# Altium PCB etf_blink.PcbDoc
Units mm, origin at the board's own origin, x right, y up, seen from the top; angles counter-clockwise.
Board outline 83 x 40 mm, 4 copper layers (L1 - SIG/PWR, L2 - GND, L3 - PWR, L4 - SIG/GND), stack 0.603 mm thick; 81 components, 56 nets, 244 pads, 97 vias.
Unrouted connection lines stored in the file: 1.
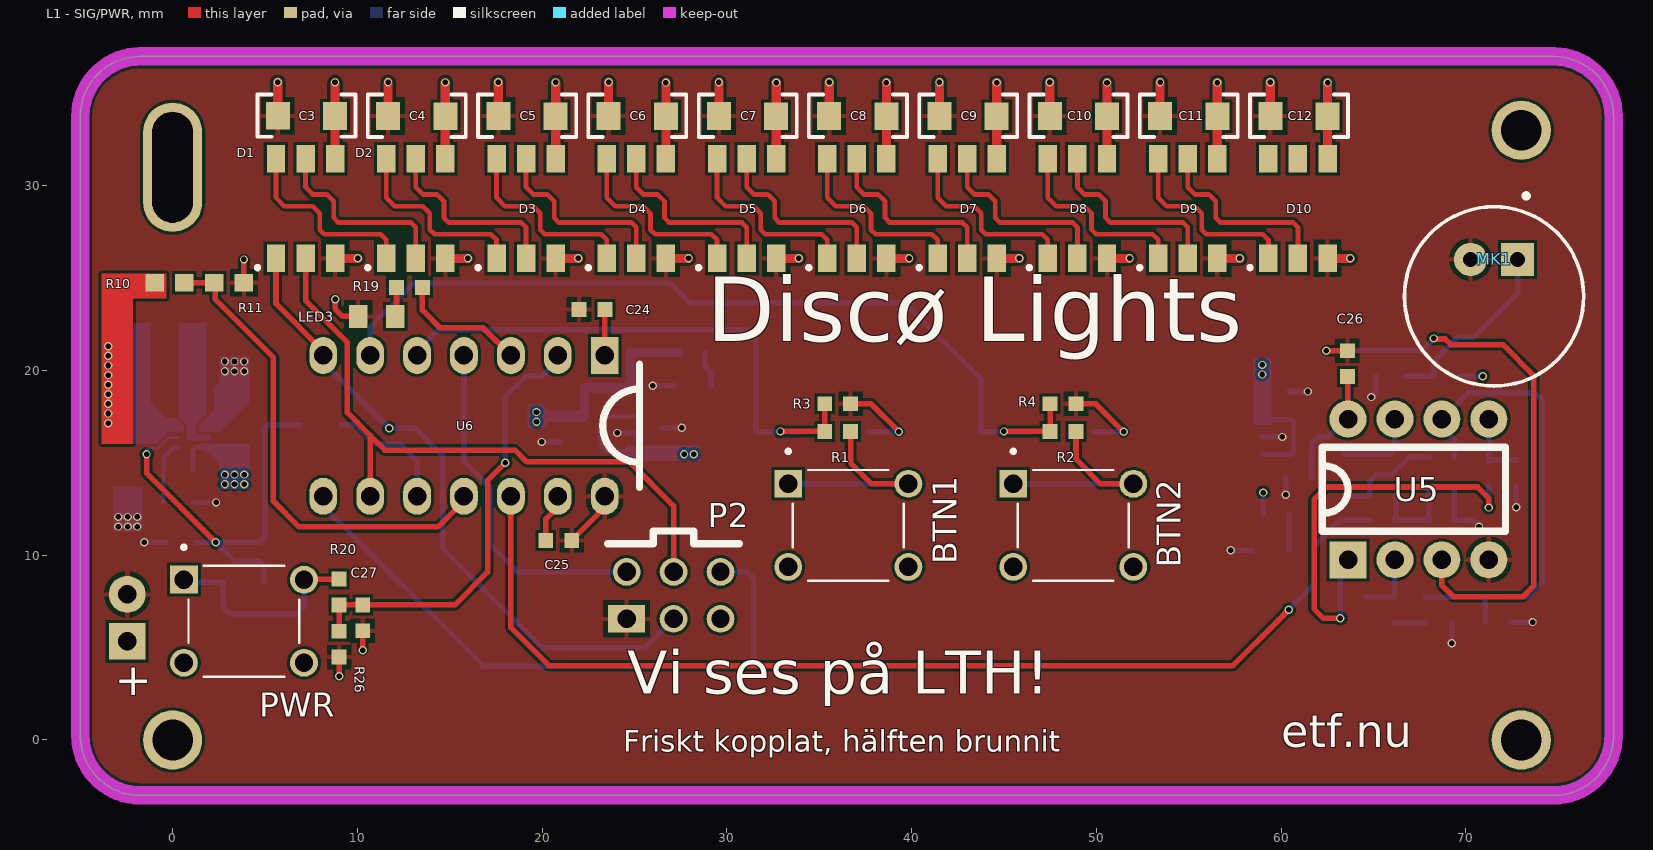
[diagram p0: L1 - SIG/PWR view]
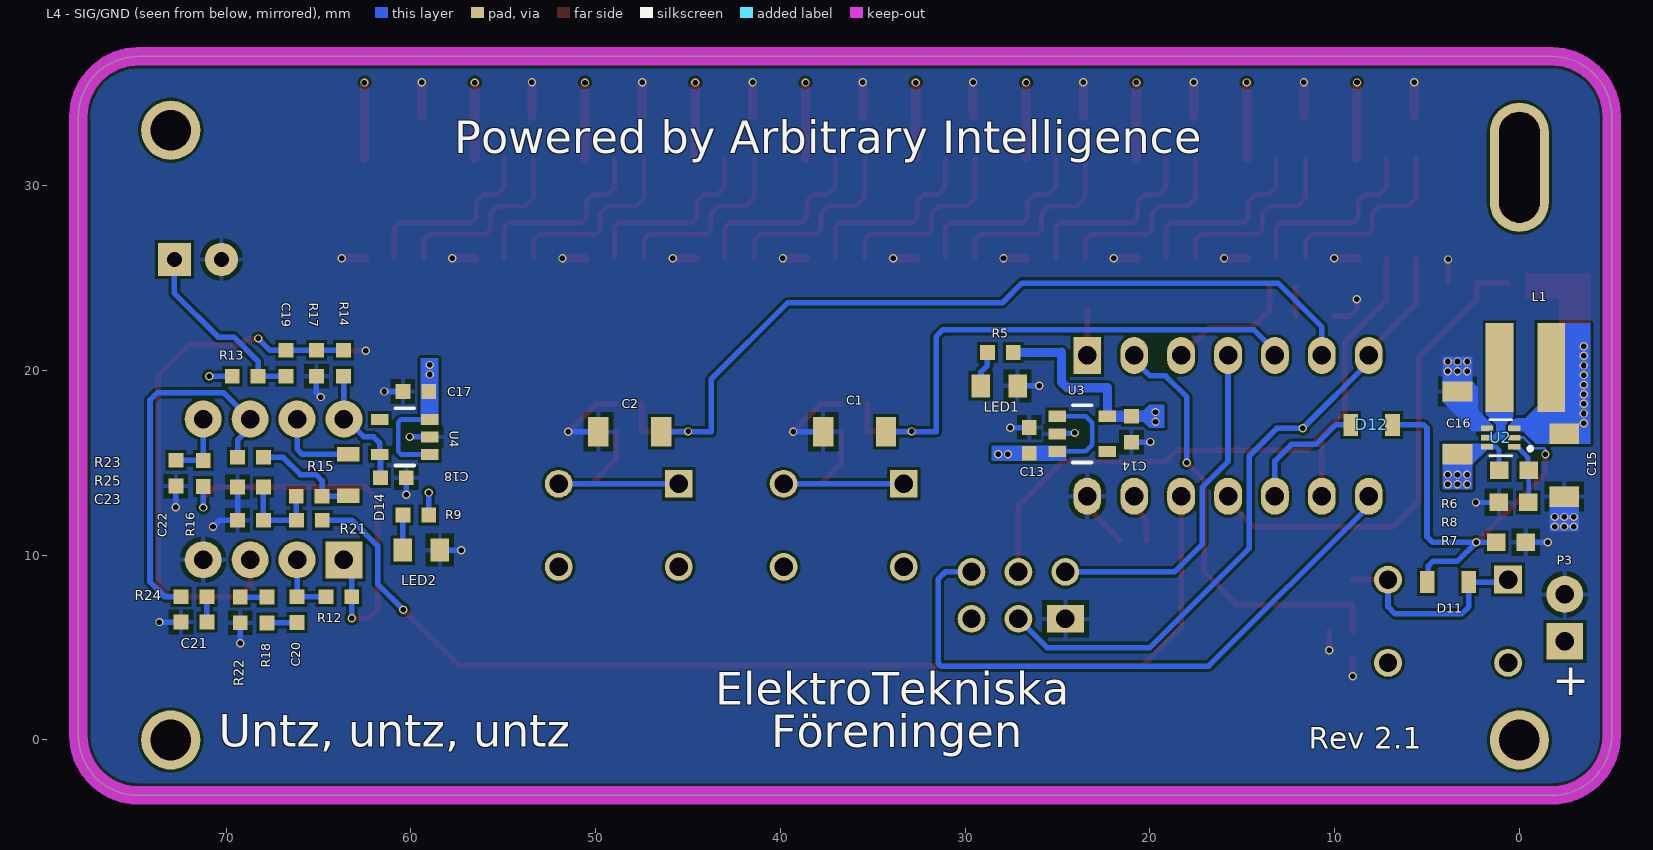
[diagram p1: L4 - SIG/GND view, seen from below]
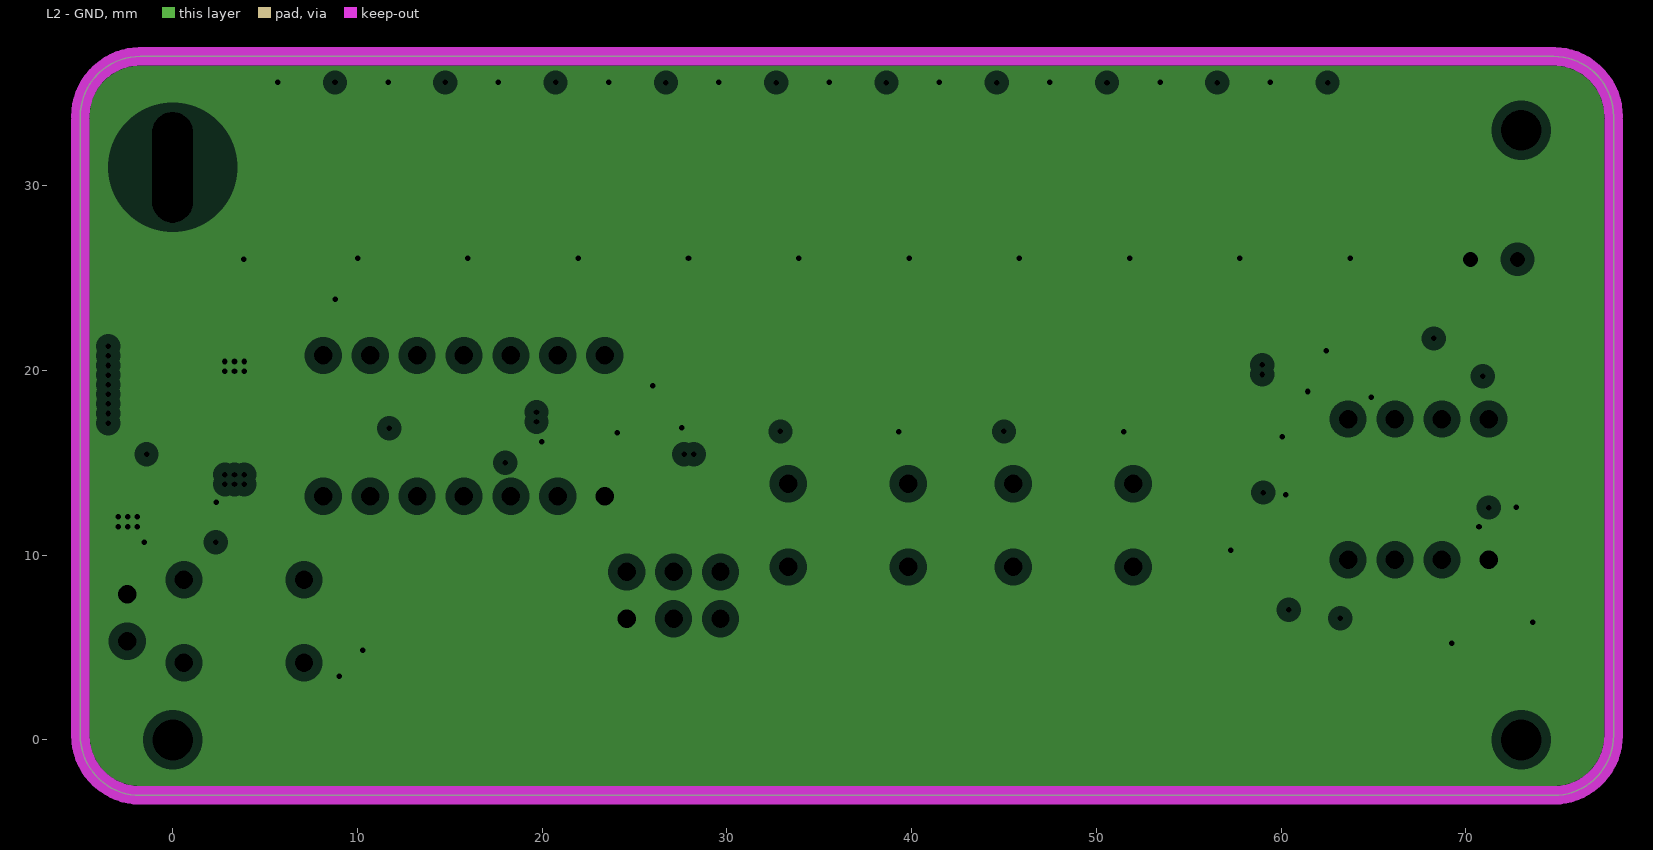
[diagram p2: L2 - GND, clearances drawn from the general rule]
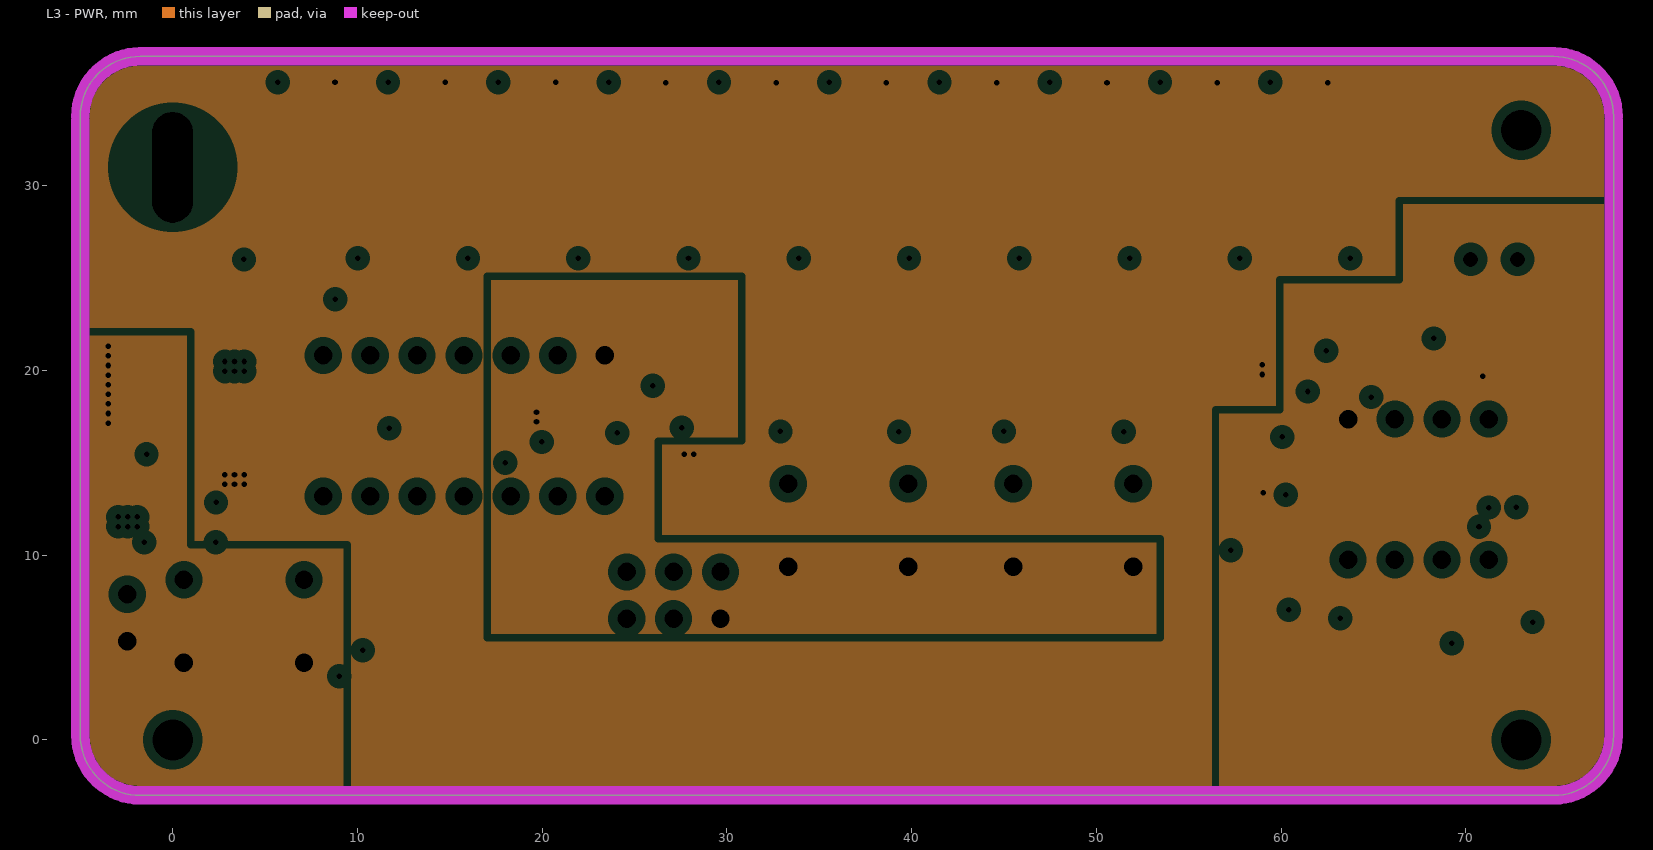
[diagram p3: L3 - PWR, clearances drawn from the general rule]
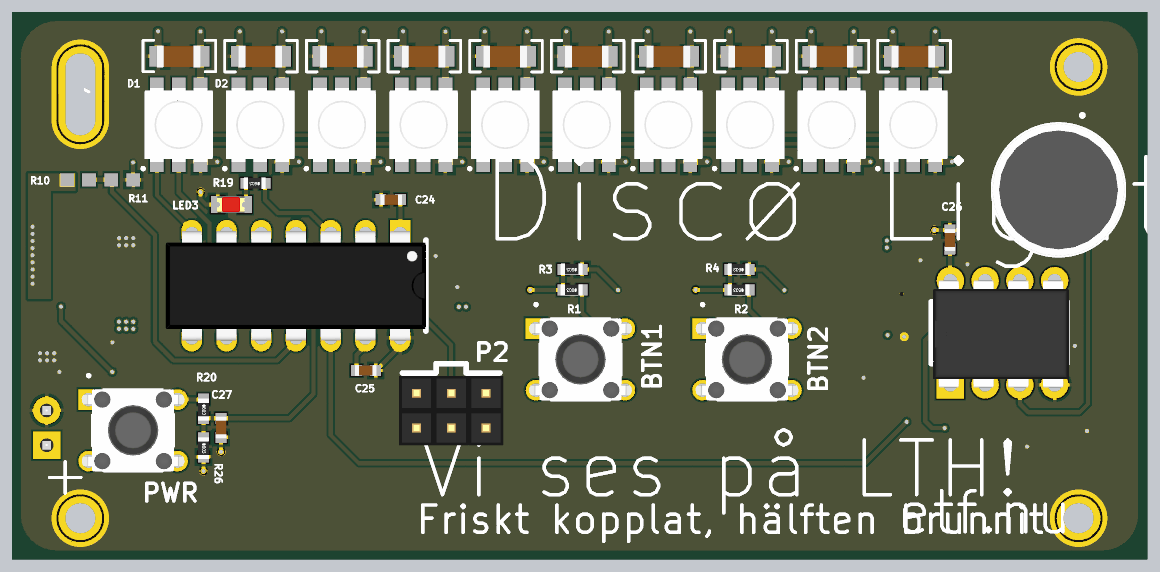
[diagram p4: 3D render of the assembled board from above, using the file's embedded part models]
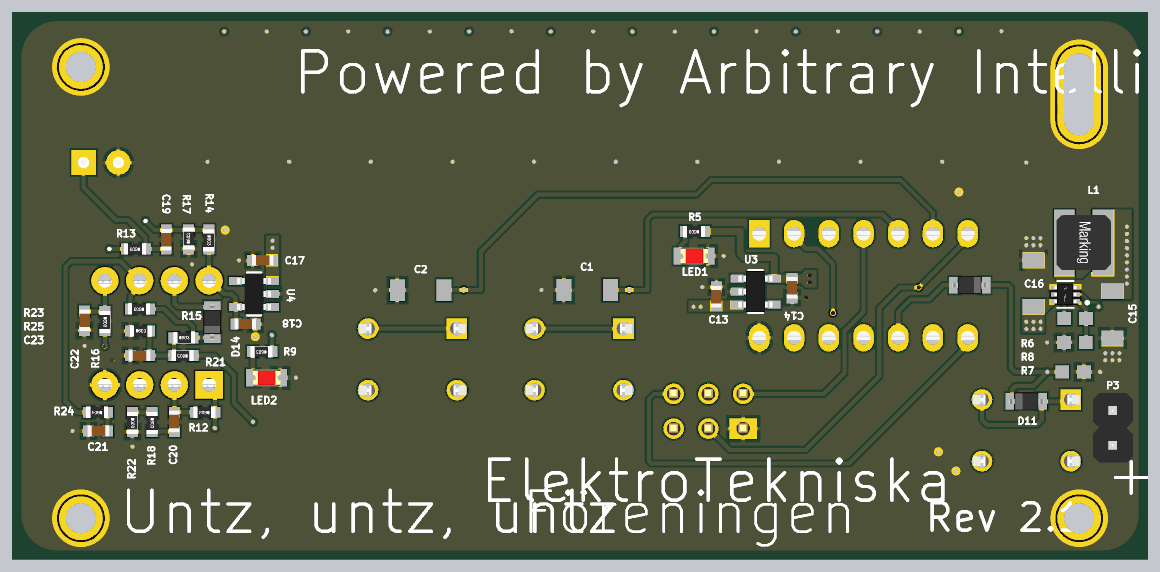
[diagram p5: 3D render of the assembled board from below, using the file's embedded part models]

## Layer stack, top to bottom
Top Solder: solder mask 0.0102, Solder Resist, Dk 3.5
L1 - SIG/PWR: signal copper 0.0356
Dielectric 2: prepreg 0.0711, PP-006, Dk 4.1
L2 - GND: plane copper 0.035, net GND
Dielectric 1: dielectric 0.32, FR-4, Dk 4.8
L3 - PWR: plane copper 0.035, net (Multiple Nets)
Dielectric 3: prepreg 0.0711, PP-006, Dk 4.1
L4 - SIG/GND: signal copper 0.0356
Bottom Solder: solder mask 0.0102, Solder Resist, Dk 3.5

## Board outline
-5,0.25 -5,33.5 -5,33.75 cw(c-1.75,33.75) -1.75,37 74.75,37 cw(c74.75,33.75) 78,33.75 78,33.5 78,0.25 cw(c74.75,0.25) 74.75,-3 -1.75,-3 cw(c-1.75,0.25)

## Design rules (kind name [scope] priority, off if disabled: settings)
Clearance Clearance_1 [InNet('NetL1_1') or InNet('NetC15_1')] p1: gap=0.12 ignorepadtopadclearanceinfootprint=TRUE except(0: Arc-Hole Track-Hole SMDPad-Hole THPad-Hole Via-Hole Fill-Hole Poly-Hole Region-Hole Text-Hole; 0.185: SMDPad-SMDPad; 0.2: Arc-SMDPad Track-SMDPad; 0.254: Arc-Arc Arc-Track Arc-THPad Arc-Via Arc-Text Track-Track Track-THPad Track-Via Track-Text SMDPad-THPad SMDPad-Via SMDPad-Text THPad-THPad THPad-Via THPad-Text Via-Via Via-Text Fill-Text Poly-Text Region-Text Text-Text)
Clearance [All] p2: gap=0.15 ignorepadtopadclearanceinfootprint=FALSE except(0: Arc-Hole Track-Hole SMDPad-Hole THPad-Hole Via-Hole Fill-Hole Poly-Hole Region-Hole Text-Hole; 0.185: SMDPad-SMDPad; 0.2: Arc-SMDPad Track-SMDPad; 0.254: Arc-Arc Arc-Track Arc-THPad Arc-Via Arc-Text Track-Track Track-THPad Track-Via Track-Text SMDPad-THPad SMDPad-Via SMDPad-Text THPad-THPad THPad-Via THPad-Text Via-Via Via-Text Fill-Text Poly-Text Region-Text Text-Text)
HoleSize [All] p1: absolutevalues=TRUE maxlimit=6 minlimit=0.025 maxpercent=80.000 minpercent=20.000
HoleToHoleClearance [All] p1: gap=0.2 allowstackedmicrovias=TRUE
MinimumSolderMaskSliver [All] p1: minsoldermaskwidth=0.1
PlaneClearance [All] p1: clearance=0.508
PlaneConnect PlaneConnect_1 [IsVia] p1: planeconnectstyle=Direct reliefexpansion=0.508 reliefentries=4 reliefconductorwidth=0.254 reliefairgap=0.254
PlaneConnect [All] p2: planeconnectstyle=Direct reliefexpansion=0.508 reliefentries=4 reliefconductorwidth=0.254 reliefairgap=0.254
PolygonConnect PolygonConnect_1 [IsVia] p1: connectstyle=Direct reliefconductorwidth=0.254 reliefentries=4 polygonreliefangle="90 Angle" airgapwidth=0.254
PolygonConnect [All] p2: connectstyle=Relief reliefconductorwidth=0.254 reliefentries=4 polygonreliefangle="90 Angle" airgapwidth=0.254
RoutingVias [All] p1: holewidth=0.2 width=0.45 viastyle="Through Hole" minholewidth=0.2 minwidth=0.45 maxholewidth=0.3 maxwidth=1.6
SilkToSolderMaskClearance [IsPad] p1: minsilkscreentomaskgap=0.1 clearancetoexposedcopper=TRUE
SolderMaskExpansion [All] p1: expansion=0.102 istentingtop=FALSE
SupplyNets "Schematic Supply Nets_4" [InNet('VBAT')] p1: voltage=0.000
SupplyNets "Schematic Supply Nets_3" [InNet('GND')] p2: voltage=0.000
SupplyNets "Schematic Supply Nets_2" [InNet('5V_A')] p3: voltage=0.000
SupplyNets "Schematic Supply Nets_1" [InNet('5V_D')] p4: voltage=0.000
SupplyNets "Schematic Supply Nets" [InNet('5V3')] p5: voltage=0.000
Width [All] p1: maxlimit=1.5 minlimit=0.15 preferedwidth=0.3
24 further rules are at their usual default settings.

## Classes and differential pairs
component class U_mcu: C24 C25 LED3 P2 R19 U6
component class U_etf_pwr: C13 C14 C15 C16 C17 C18 C27 D11 D12 L1 LED1 LED2 P3 PWR R5 R6 R7 R8 R9 R10 R11 R20 R26 U2 U3 U4
component class make_etf_great_again: BTN1 BTN2 C1 C2 R1 R2 R3 R4 R21
component class LEDS: 3S C3 C4 C5 C6 C7 C8 C9 C10 C11 C12 D1 D2 D3 D4 D5 D6 D7 D8 D9 D10
component class AUDIO: C19 C20 C21 C22 C23 C26 D14 MK1 R12 R13 R14 R15 R16 R17 R18 R22 R23 R24 R25 U5

## Components (designator, comment, footprint, x,y, rotation, side; value= is the part's Value field where it differs from the comment)
BTN1 "Tactile Button" SW_TS02-66-150-BK-160-LCR-D 36.575,11.616 r0 top value=Button
BTN2 "Tactile Button" SW_TS02-66-150-BK-160-LCR-D 48.752,11.615 r0 top value=Button
C1 "CAP, 1206" 1206_180 35.987,16.686 r0 bottom value=1u
C2 "CAP, 1206" 1206_180 48.154,16.675 r0 bottom value=1u
C3 "1206, capacitor" "1206, capasitor" 9.365,33.744 r0 top value=100n
C4 "1206, capacitor" "1206, capasitor" 15.339,33.739 r0 top value=100n
C5 "1206, capacitor" "1206, capasitor" 21.308,33.739 r0 top value=100n
C6 "1206, capacitor" "1206, capasitor" 27.277,33.739 r0 top value=100n
C7 "1206, capacitor" "1206, capasitor" 33.246,33.739 r0 top value=100n
C8 "1206, capacitor" "1206, capasitor" 39.215,33.739 r0 top value=100n
C9 "1206, capacitor" "1206, capasitor" 45.184,33.739 r0 top value=100n
C10 "1206, capacitor" "1206, capasitor" 51.153,33.739 r0 top value=100n
C11 "1206, capacitor" "1206, capasitor" 57.122,33.739 r0 top value=100n
C12 "1206, capacitor" "1206, capasitor" 63.091,33.739 r0 top value=100n
C13 "0603, capacitor" "0603 cap"#1 26.53,16.22 r90 bottom value=1u
C14 "0603, capacitor" "0603 cap"#1 21,16.82 r270 bottom value=1u
C15 "CAP, 1206" 1206_180 -2.43,14.87 r270 bottom value=10u
C16 "CAP, 1206" 1206_180 3.35,17.165 r90 bottom value=10u
C17 "0603, capacitor" "0603 cap"#1 59.735,18.864 r0 bottom value=1u
C18 "0603, capacitor" "0603 cap"#1 60.948,14.19 r180 bottom value=1u
C19 "0603, capacitor" "0603 cap"#1 66.755,20.391 r90 bottom value=10u
C20 "0603, capacitor" "0603 cap"#1 66.168,7.051 r270 bottom value=10u
C21 "0603, capacitor" "0603 cap"#1 71.745,6.384 r0 bottom value=NC
C22 "0603, capacitor" "0603 cap"#1 72.727,14.441 r270 bottom value=1n
C23 "0603, capacitor" "0603 cap"#1 68.685,11.889 r180 bottom value=10u
C24 "0603, capacitor" "0603 cap"#2 22.7,23.3 r180 top value=100n
C25 "0603, capacitor" "0603 cap"#2 20.9,10.8 r0 top value=100n
C26 "0603, capacitor" "0603 cap"#2 63.593,20.372 r90 top value=100n
C27 "0603, capacitor" "0603 cap"#2 10.29,6.608 r270 top value=1u
D1 "Neo - SK9822" SK9822 7.195,28.767 r90 top
D2 "Neo - SK9822" SK9822 13.164,28.767 r90 top
D3 "Neo - SK9822" SK9822 19.133,28.767 r90 top
D4 "Neo - SK9822" SK9822 25.102,28.767 r90 top
D5 "Neo - SK9822" SK9822 31.071,28.767 r90 top
D6 "Neo - SK9822" SK9822 37.04,28.767 r90 top
D7 "Neo - SK9822" SK9822 43.009,28.767 r90 top
D8 "Neo - SK9822" SK9822 48.978,28.767 r90 top
D9 "Neo - SK9822" SK9822 54.947,28.767 r90 top
D10 "Neo - SK9822" SK9822 60.916,28.767 r90 top
D11 "Diode, SMD" SOD323#1 3.861,8.595 r180 bottom
D12 "Diode, SMD" SOD323#2 8,17 r0 bottom
D14 "Diode, SMD" SOD323#1 63.442,14.34 r90 bottom
L1 "Inductor, 1616" XEL4030-102MEC -0.323,20.16 r180 bottom value=1u
LED1 "0805, LED" 0805_led#1 28.163,19.195 r0 bottom value="0805 LED"
LED2 "0805, LED" 0805_led#1 59.435,10.296 r0 bottom value="0805 LED"
LED3 "0805, LED" 0805_led#2 11.039,22.904 r0 top value="0805 LED"
MK1 "Electret" ElectretMic_9.7mm_6.7mm 71.53,24.01 r90 top
P2 "2x3 Pin Header" "2x3 PH" 24.576,6.555 r0 top value="2x3 Pin Header, 2.54mm"
P3 "1x2 Pin Header" padtwo_L -2.457,5.341 r0 bottom
PWR "Tactile Button" SW_TS02-66-150-BK-160-LCR-D 3.861,6.426 r0 top value=Button
R1 "0603, resistor" 0603#1 36,16.7 r180 top value=1k
R2 "0603, resistor" 0603#1 48.2,16.7 r180 top value=1k
R3 "0603, resistor" 0603#1 36,18.2 r180 top value=10k
R4 "0603, resistor" 0603#1 48.2,18.2 r180 top value=10k
R5 "0603, resistor" 0603#2 28.093,20.97 r0 bottom value=1k
R6 "RES, 0603" 0603#3 0.3,14.595 r0 bottom value=768k
R7 "RES, 0603" 0603#3 0.45,10.7 r0 bottom value=10k
R8 "RES, 0603" 0603#3 0.31,12.855 r180 bottom value=100k
R9 "0603, resistor" 0603#2 59.735,12.181 r0 bottom value=1k
R10 "RES, 0603" 0603#3 -0.165,24.75 r180 top value=10k
R11 "RES, 0603" 0603#3 3.06,24.75 r180 top value=10k
R12 "0603, resistor" 0603#2 63.905,7.751 r0 bottom value=20k
R13 "0603, resistor" 0603#2 68.975,19.691 r0 bottom value=5k6
R14 "0603, resistor" 0603#2 63.645,20.391 r270 bottom value=100k
R15 "0603, resistor" 0603#1 65.51,13.19 r180 bottom value=120R
R16 "0603, resistor" 0603#2 71.245,14.421 r270 bottom value=10k
R17 "0603, resistor" 0603#2 65.115,20.391 r90 bottom value=56k
R18 "0603, resistor" 0603#2 67.795,7.031 r270 bottom value=1k
R19 "0603, resistor" 0603#1 12.819,24.494 r180 top value=1k
R20 "0603, resistor" 0603#1 9.013,8.008 r270 top value=1k
R21 "0603, resistor" 0603#2 65.495,11.891 r0 bottom value=0R
R22 "0603, resistor" 0603#2 69.235,7.041 r270 bottom value=0R
R23 "0603, resistor" 0603#2 68.685,15.301 r0 bottom value=0R
R24 "0603, resistor" 0603#2 71.745,7.751 r0 bottom value=NC
R25 "0603, resistor" 0603#2 68.685,13.691 r180 bottom value=10k
R26 "0603, resistor" 0603#1 9.013,5.183 r270 top value=10k
U2 "TPS61023" SOT50P160X60-6N 1.01,16.365 r0 bottom
U3 "TPS7A20" SOT23-5 23.663,16.57 r180 bottom
U4 "TPS7A20" SOT23-5 60.335,16.401 r0 bottom
U5 "LM358" DIP8 63.625,9.751 r90 top value=595-LM358P
U6 "ATTINY44A" DIP14 15.771,17.001 r270 top

## Footprints (in the part's own frame and the unit in brackets; to place one, negate y for a bottom-side part, rotate by r counter-clockwise, add the part's x,y. Pads: shape width x height; smd on the part's side, far side on the other; paste and mask are expansions set on the pad)
"2x3 PH" [mm] "2x3 Pin Header, 2.54 pitch"
  rect 2x1.5 hole 1 mask+0.05: 1(0,0)
  round 1.5 hole 1 mask+0.05: 2(2.54,0) 3(5.08,0) 4(5.08,2.54) 5(2.54,2.54) 6(0,2.54)
  body extent -1.26,-1.22 6.36,3.86, height 8.45
0603#1 [mm]
  rect 0.8x0.8 smd: 0(0.7,0) 1(-0.7,0)
  body extent -0.73,-0.41 0.87,0.41, height 0.45
0603#2 [mm]
  rect 0.8x0.8 smd mask+0.05: 0(0.7,0) 1(-0.7,0)
  body extent -0.73,-0.41 0.87,0.41, height 0.45
0603#3 [mm]
  rect 1x0.95 smd mask+0.05: 1(-0.8,0) 2(0.8,0)
  body extent -0.87,-0.47 0.87,0.47, height 1
"0603 cap"#1 [mm]
  rect 0.8x0.8 smd mask+0.05: 0(0.7,0.002) 1(-0.7,0.002)
  body extent -0.83,-0.4 0.77,0.4, height 0.6
"0603 cap"#2 [mm]
  rect 0.8x0.8 smd: 0(0.7,0.002) 1(-0.7,0.002)
  body extent -0.83,-0.4 0.77,0.4, height 0.6
0805_led#1 [mm]
  rect 1x1.25 smd mask+0.05: 0(-1,0.025) 1(1,0.025)
  body extent -1.03,-0.6 0.99,0.65, height 1.1
0805_led#2 [mm]
  rect 1x1.25 smd: 0(-1,0.025) 1(1,0.025)
  body extent -1.03,-0.6 0.99,0.65, height 1.1
"1206, capasitor" [mm] "Generic 1206"
  rect 1.3x1.5 smd mask+0.05: 0(-3.673,0.038) 1(-0.575,0.026)
  silkscreen extent -4.78,-1.1 0.53,1.2, body extent -3.78,-0.79 -0.58,0.81
1206_180 [mm]
  rect 1.1x1.6 smd mask+0.05: 1(-1.7,0) 2(1.7,0)
  body extent -1.75,-0.95 1.75,0.95, height 1.8
DIP8 [mm]
  rect 2x2 hole 1: 1(0,0)
  round 2 hole 1: 2(0,-2.54) 3(0,-5.08) 4(0,-7.62) 5(7.62,-7.62) 6(7.62,-5.08) 7(7.62,-2.54) 8(7.62,0)
  silkscreen extent 1.55,-8.52 6.08,1.4, body extent -0.19,-8.65 7.63,1.26, height 4.57
DIP14 [mm]
  rect 2x1.5 hole 1 mask+0.05: 1(-3.81,7.62)
  oval 2x1.5 hole 1 mask+0.05: 2(-3.81,5.08) 3(-3.81,2.54) 4(-3.81,0) 5(-3.81,-2.54) 6(-3.81,-5.08) 7(-3.81,-7.62) 8(3.81,-7.62) 9(3.81,-5.08) 10(3.81,-2.54) 11(3.81,0) 12(3.81,2.54) 13(3.81,5.08) 14(3.81,7.62)
  body extent -4,-9.53 4,9.52, height 3.51
ElectretMic_9.7mm_6.7mm [mm]
  rect 1.8x1.8 hole 0.8 mask+0.05: 1(2,-1.27)
  round 1.8 hole 0.8 mask+0.05: 2(2,1.27)
  silkscreen extent -4.85,-4.85 5.54,4.85, body extent -4.85,-4.85 4.85,4.85, height 4.71
padtwo_L [mm] "Pad Diameter 2 mm, Hole  0.3 mm, Pitch 2.54 mm"
  rect 2x2 hole 1 mask+0.05: 1(0,0)
  round 2 hole 1 mask+0.05: 2(0,-2.54)
  body extent -1.46,-3.81 1.46,1.27, height 8.51
SK9822 [mm]
  rect 1.5x1 smd mask+0.05: 1(-2.7,1.6) 2(-2.7,0) 3(-2.7,-1.6) 4(2.7,-1.6) 5(2.7,0) 6(2.7,1.6)
  silkscreen extent -3.3,2.5 -3.1,2.7, body extent -2.7,-2.5 2.7,2.5, height 1.75
SOD323#1 [mm]
  rect 0.8x1.2 smd mask+0.05: 1(-1.125,-0.051) 2(1.125,-0.051)
  body extent -1.3,-0.73 1.3,0.62, height 1.1
SOD323#2 [mm]
  rect 0.8x1.2 smd mask+0: 1(-1.125,-0.051) 2(1.125,-0.051)
  body extent -1.3,-0.73 1.3,0.62, height 1.1
SOT23-5 [mm] "SOT23, 5-Leads, Body 2,90x2,80mm, Pitch 0,95mm, IPC Medium Density"
  rect 0.95x0.6 smd mask+0.05: 1(-1.35,0.95) 2(-1.35,0) 3(-1.35,-0.95) 4(1.35,-0.95) 5(1.35,0.95)
  silkscreen extent -0.5,-1.55 0.5,1.55, body extent -1.25,-1.5 1.25,1.5, height 1.1
SOT50P160X60-6N [mm]
  rect 0.66x0.31 smd mask+0.05: 1(-0.735,0.5)
  rect 0.66x0.31 smd: 2(-0.735,0) 3(-0.735,-0.5) 4(0.735,-0.5) 5(0.735,0) 6(0.735,0.5)
  silkscreen extent -1.7,-0.98 0.6,0.97, body extent -0.81,-0.8 0.81,0.8, height 0.59
SW_TS02-66-150-BK-160-LCR-D [mm]
  rect 1.508x1.508 / inner round 1.508 / far side rect 1.508x1.508 hole 1 mask+0.05: 1(-3.25,2.25)
  round 1.508 hole 1 mask+0.05: 2(3.25,2.25) 3(-3.25,-2.25) 4(3.25,-2.25)
  silkscreen extent -3.35,-3 3,4.1, body extent -3.95,-3 3.95,3, height 15
XEL4030-102MEC [mm]
  rect 1.5x4.8 smd: 1(-1.4,0) 2(1.4,0)
  body extent -2,-2 2,2, height 2.15

## Part data
BTN1 BTN2 PWR: library part "TacButton TH", "Tactile Switch Small Low", Mount=No
C1 C2: JLCPCB Part #=C1848, Manufacturer Part Number=CC1206JKX7R7BB105, Mount=Yes
C3 C4 C5 C6 C7 C8 C9 C10 C11 C12: JLCPCB Part #=C24497, Manufacturer Part Number=CL31B104KBCNNNC, Mount=Yes
C13 C14 C17 C18 C27: JLCPCB Part #=C77386, Manufacturer Part Number=GRM188R61H105KAALD, Mount=Yes
C15 C16: JLCPCB Part #=C342827, Manufacturer Part Number=C3216X7R1C106KT000N, Mount=Yes
C19 C20 C23: JLCPCB Part #=C386081, Manufacturer Part Number=TMK107BBJ106MA-T, Mount=Yes
C22: JLCPCB Part #=C100040, Manufacturer Part Number=CC0603KRX7R9BB102, Mount=Yes
C24 C25 C26: JLCPCB Part #=C14663, Manufacturer Part Number=CC0603KRX7R9BB102, Mount=Yes
D1 D2 D3 D4 D5 D6 D7 D8 D9 D10: JLCPCB Part #=C2829089, Manufacturer Part Number=SK9822, Mount=Yes
D11 D12 D14: JLCPCB Part #=C117941, Manufacturer Part Number=BAT760,115, Mount=Yes
L1: "Shielded Power Inductor with Ferrite Core", AC Current=1, JLCPCB Part #=C19947630, Manufacturer Part Number=SRN4018BTA-1R0Y, DC Resistance=1, Mount=No
LED1 LED2 LED3: JLCPCB Part #=C2295, Manufacturer Part Number=KP-2012SURCK, Mount=Yes
MK1: library part "Electret Mic", "D9.7mm H6.7mm, Electrokit art nr: 40290007", Mount=No
P3: "2.54 mm, TH", Mount=No
R1 R2: JLCPCB Part #=C21190, Manufacturer Part Number=RC0603JR-070RL, Mount=Yes
R3 R4: JLCPCB Part #=C98220, Manufacturer Part Number=RC0603JR-070RL, Mount=Yes
R5 R9 R18 R19 R20: JLCPCB Part #=C21190, Manufacturer Part Number=CR0603-FX-1001ELF, Mount=Yes
R6: JLCPCB Part #=C2933258, Manufacturer Part Number=CR0603F768KP05Z, Mount=Yes
R7 R10 R11 R16 R25 R26: JLCPCB Part #=C98220, Manufacturer Part Number=RC0603FR-0710KL, Mount=Yes
R8 R14: JLCPCB Part #=C14675, Manufacturer Part Number=RC0603FR-07100KL, Mount=Yes
R12: JLCPCB Part #=C723637, Manufacturer Part Number=RT0603BRD0720KL, Mount=Yes
R13: JLCPCB Part #=C138278, Manufacturer Part Number=AC0603FR-075K6L, Mount=Yes
R15: JLCPCB Part #=C114681, Manufacturer Part Number=RC0603JR-07120RL, Mount=Yes
R17: JLCPCB Part #=C114630, Manufacturer Part Number=C3216X7R1C106KT000N, Mount=Yes
R21 R22 R23: JLCPCB Part #=C95177, Manufacturer Part Number=RC0603JR-070RL, Mount=Yes
U2: "TPS61023 3.7-A Boost Converter with 0.5-V Ultra-low Input Voltage", JLCPCB Part #=C919459, Manufacturer Part Number=TPS61023DRLR, Mount=Yes
U3 U4: "5V and 300-mA, Ultra-Low-Noise, Low-IQ, High PSRR LDO", JLCPCB Part #=C2873627, Manufacturer Part Number=TPS7A2045PDBVR, Mount=Yes
U5: "Dual FET-Input Operational Amplifier", Mount=No
U6: "8-bit microcontrollers based on the AVR® enhanced RISC / architecture.", JLCPCB Part #=C2325, Mount=Yes
C21 P2 R24: Mount=No

## Free pads (board coordinates)
  round 3.2 hole 2.2 mask+0.5: NC(0,0) NC(73,0) NC(73,33)
  oval 3.2x7 hole 2.2 slot 6 at 90 deg mask+0.5: NC(0,31)

## Via types
v1: diameter 0.45, hole 0.3, L1 - SIG/PWR to L4 - SIG/GND, 94 vias
v2: diameter 0.45, hole 0.3, L1 - SIG/PWR to L4 - SIG/GND, tented both sides, 3 vias

## Nets (pads, with @x,y where several pads share a name; then routed paths per layer and width w, separated by ;. In a path a pad name is that pad's centre, name@x,y a point inside that pad or via, vN(x,y) a via of type N, cw(c..) or ccw(c..) an arc to the next point about the centre after c; other vN are vias at no path point)
5V3: C3.1 C4.1 C5.1 C6.1 C7.1 C8.1 C9.1 C10.1 C11.1 C12.1 C13.1 C16.1 C17.1 D1.4 D2.4 D3.4 D4.4 D5.4 D6.4 D7.4 D8.4 D9.4 D10.4 R6.2 U2.6 U3.1 U3.3 U4.1 U4.3 | length 53.4
  L1 - SIG/PWR w0.3: D1.4@8.79,31.472 D1.4
  L1 - SIG/PWR w0.5: D1.4@8.79,31.472 C3.1 v1(8.79,35.59) ; v1(14.759,35.59) 14.759,31.467 D2.4 ; v1(20.728,35.59) 20.733,35.59 C5.1 D3.4 ; D4.4 C6.1 v1(26.702,35.585) ; D5.4 C7.1 v1(32.671,35.585) ; D6.4 C8.1 v1(38.64,35.585) ; D7.4 C9.1 v1(44.609,35.585) ; D8.4 C10.1 v1(50.578,35.585) ; D9.4 v1(56.547,35.585) ; D10.4 C12.1 v1(62.516,35.585)
  L4 - SIG/GND w0.254: R6.2 1.1,15.685 1.28,15.865 U2.6 ; U3.3 23.483,15.62 23.115,15.988 23.115,17.172 23.463,17.52 U3.1 ; U4.1 60.535,15.451 60.695,15.611 60.695,17.202 60.546,17.351 U4.3
  other v1: 2.83,13.845 3.35,13.845 3.87,13.845 2.83,14.365 3.35,14.365 3.87,14.365 27.683,15.46 28.203,15.46 58.985,19.781 58.985,20.301
5V_A: C18.1 C26.1 R9.1 R13.0 R14.0 U4.5 U5.8 | length 11.5
  L1 - SIG/PWR w0.3: C26.1 63.608,19.655 63.608,17.388 U5.8
  L4 - SIG/GND w0.3: R9.1 v1(59.035,13.391) ; C18.1 61.648,15.414 U4.5 61.685,16.061 62.025,16.401 62.544,16.401 63.514,17.371 U5.8 63.625,19.691 R14.0 ; R13.0 v1(70.915,19.691)
5V_D: BTN1.3 BTN1.4 BTN2.3 BTN2.4 C14.1 C24.1 P2.3 R5.1 U3.5 U6.1 | length 10.8
  L1 - SIG/PWR w0.3: U6.1 23.4,20.82 C24.1
  L4 - SIG/GND w0.5: U3.5@22.298,17.535 22.298,19.06 ; 22.323,19.06 24.473,19.06 24.783,19.37 24.783,20.98 24.793,20.97 R5.1
  other v1: 19.697,17.23 19.697,17.75
ADC1: R21.1 U6.12 | length 58.9
  L1 - SIG/PWR w0.3: U6.12 18.311,6.076 20.369,4.018 57.387,4.018 59.738,6.369 v2(60.415,7.046)
  L4 - SIG/GND w0.3: v2(60.415,7.046) 60.415,7.058 61.804,8.447 61.804,10.502 63.194,11.891 R21.1
AUDIO_ADC: C23.0 R15.1 R21.0 R25.0 | length 4.9
  L4 - SIG/GND w0.3: R15.1 66.202,13.182 66.202,11.899 R21.0 C23.0 R25.0
BTN1: C1.1 R1.0 R3.0 U6.5 | length 31
  L1 - SIG/PWR w0.3: v1(32.9,16.7) R1.0 R3.0
  L4 - SIG/GND w0.3: U6.5 13.231,21.061 14.385,22.215 31.198,22.215 31.575,21.838 31.575,16.686 C1.1
BTN2: C2.1 R2.0 R4.0 U6.6 | length 47.3
  L1 - SIG/PWR w0.3: v1(45,16.7) R2.0 R4.0
  L4 - SIG/GND w0.3: U6.6 10.691,22.363 13.058,24.73 26.924,24.73 27.993,23.661 39.614,23.661 43.752,19.523 43.752,16.685 46.444,16.685 C2.1
GND: C1.2 C2.2 C3.0 C4.0 C5.0 C6.0 C7.0 C8.0 C9.0 C10.0 C11.0 C12.0 C13.0 C14.0 C15.2 C16.2 C17.0 C18.0 C21.0 C22.0 C23.1 C24.0 C25.0 C26.0 C27.0 D1.3 D2.3 D3.3 D4.3 D5.3 D6.3 D7.3 D8.3 D9.3 D10.3 LED1.0 LED2.0 LED3.0 MK1.2 P2.1 P3.2 R3.1 R4.1 R7.1 R8.1 R11.1 R17.1 R22.0 R25.1 R26.0 U2.4 U3.2 U4.2 U5.4 U6.14 | length 68.4
  L1 - SIG/PWR w0.3: R11.1 v1(3.86,26.01) ; v1(8.798,23.851) 8.798,23.329 9.198,22.929 LED3.0 ; v1(9.013,3.456) R26.0 ; v1(10.292,4.857) C27.0 ; C25.0 23.161,12.364 23.161,12.961 U6.14 ; R3.1 37.802,18.2 v1(39.316,16.686) ; R4.1 49.958,18.2 v1(51.483,16.675) ; v1(62.447,21.072) C26.0
  L1 - SIG/PWR w0.5: C3.0@5.687,33.786 v1(5.687,35.606) ; D1.3 v1(10.017,26.067) ; C4.0@11.661,33.781 v1(11.661,35.601) ; D2.3 v1(15.986,26.067) ; C5.0@17.63,33.781 v1(17.63,35.601) ; D3.3 v1(21.955,26.067) ; C6.0@23.599,33.781 v1(23.599,35.601) ; D4.3 v1(27.924,26.067) ; C7.0 v1(29.573,35.596) ; D5.3 v1(33.893,26.067) ; C8.0 v1(35.542,35.596) ; D6.3 v1(39.862,26.067) ; C9.0@41.506,33.781 v1(41.506,35.601) ; D7.3 v1(45.831,26.067) ; C10.0 v1(47.48,35.596) ; D8.3 v1(51.8,26.067) ; C11.0 v1(53.449,35.596) ; D9.3 v1(57.769,26.067) ; C12.0 v1(59.418,35.596) ; D10.3 v1(63.738,26.067)
  L4 - SIG/GND w0.254: R8.1 v1(2.35,12.855)
  L4 - SIG/GND w0.3: v1(-1.53,10.7) R7.1 ; v1@19.986,16.12 C14.0 ; v1(24.073,16.62) 24.098,16.595 24.988,16.595 U3.2 ; v1(25.993,19.17) LED1.0 ; C13.0 26.542,16.911 27.554,16.911 v1(27.563,16.901) ; C1.2 v1(39.316,16.686) ; C2.2 v1(51.483,16.675) ; v1(57.275,10.271) LED2.0 ; U4.2 v1(60.064,16.401) ; v1(60.248,13.271) C18.0 ; C17.0 v1(61.445,18.861) ; v1(64.875,18.561) 65.115,18.801 R17.1 ; v2(69.235,5.231) R22.0 ; R25.1 C23.1 70.365,11.891 v1(70.715,11.541) ; C21.0 v1(73.615,6.381) v1@73.635,6.361 ; v1(72.725,12.601) C22.0
  other v1: -2.95,11.55 -2.43,11.55 -1.91,11.55 -2.95,12.07 -2.43,12.07 -1.91,12.07 19.977,16.129 2.83,19.965 3.35,19.965 3.87,19.965 2.83,20.485 3.35,20.485 3.87,20.485
MISO: P2.4 U6.8 | length 34
  L4 - SIG/GND w0.3: U6.8 8.151,12.672 16.823,4 31.293,4 31.469,4.176 31.469,8.702 31.076,9.095 P2.4
MOSI: D1.1 P2.2 U6.7 | length 35.6
  L1 - SIG/PWR w0.3: D1.1 5.595,23.617 8.151,21.061 U6.7
  L4 - SIG/GND w0.3: U6.7 8.151,20.447 v1(11.727,16.871) 13.129,16.871 14.617,15.383 14.617,10.383 20,5 25.561,5 P2.2
NetBTN1_1: BTN1.1 BTN1.2 R1.1 | length 11.8
  L1 - SIG/PWR w0.3: R1.1 36.7,15 37.834,13.866 BTN1.2
  L4 - SIG/GND w0.3: BTN1.1 BTN1.2
NetBTN2_1: BTN2.1 BTN2.2 R2.1 | length 11.7
  L1 - SIG/PWR w0.3: R2.1 48.9,15.2 50.235,13.865 BTN2.2
  L4 - SIG/GND w0.3: BTN2.1 BTN2.2
NetC19_0: C19.0 R14.1 R17.0 U5.3 | length 29.4
  L1 - SIG/PWR w0.3: v1(68.271,21.733) 68.3,21.704 68.885,21.704 69.191,21.399 72.007,21.399 73.675,19.731 73.675,8.341 73.085,7.751 69.325,7.751 68.705,8.371 U5.3
  L4 - SIG/GND w0.3: R14.1 R17.0 C19.0 67.629,21.091 v1(68.271,21.733)
NetC19_1: C19.1 MK1.1 R13.1 | length 10.2
  L4 - SIG/GND w0.3: C19.1 R13.1 68.275,20.5 69.58,21.805 70.432,21.805 72.8,24.173 MK1.1
NetC20_0: C20.0 R18.0 | length 1.6
  L4 - SIG/GND w0.3: C20.0 66.175,6.341 67.785,6.341 R18.0
NetC20_1: C20.1 R12.0 U5.2 | length 3.6
  L4 - SIG/GND w0.3: R12.0 C20.1 U5.2
NetC21_1: C21.1 R24.1 | length 1.4
  L4 - SIG/GND w0.3: C21.1 R24.1
NetC22_1: C22.1 R16.1 U5.5 | length 3.7
  L4 - SIG/GND w0.3: U5.5 R16.1 71.255,15.131 72.715,15.131 C22.1
NetC25_1: C25.1 U6.13 | length 2.7
  L1 - SIG/PWR w0.3: C25.1 20.2,11.965 20.851,12.616 U6.13
NetD1_5: D1.5 D2.2 | length 10.6
  L1 - SIG/PWR w0.254: D1.5 7.195,29.91 7.576,29.529 8.338,29.529 8.719,29.148 8.719,28.259 8.973,28.005 12.91,28.005 13.164,27.751 D2.2
NetD1_6: D1.6 D2.1 | length 10.6
  L1 - SIG/PWR w0.254: D1.6 5.595,29.351 6.052,28.894 7.576,28.894 7.957,28.513 7.957,27.624 8.211,27.37 11.259,27.37 11.564,27.065 D2.1
NetD2_5: D2.5 D3.2 | length 10.6
  L1 - SIG/PWR w0.254: D2.5 13.164,29.91 13.545,29.529 14.307,29.529 14.688,29.148 14.688,28.259 14.942,28.005 18.879,28.005 19.133,27.751 D3.2
NetD2_6: D2.6 D3.1 | length 10.6
  L1 - SIG/PWR w0.254: D2.6 11.564,29.351 12.021,28.894 13.545,28.894 13.926,28.513 13.926,27.624 14.18,27.37 17.228,27.37 17.533,27.065 D3.1
NetD3_5: D3.5 D4.2 | length 10.6
  L1 - SIG/PWR w0.254: D3.5 19.133,29.91 19.514,29.529 20.276,29.529 20.657,29.148 20.657,28.259 20.911,28.005 24.848,28.005 25.102,27.751 D4.2
NetD3_6: D3.6 D4.1 | length 10.6
  L1 - SIG/PWR w0.254: D3.6 17.533,29.351 17.99,28.894 19.514,28.894 19.895,28.513 19.895,27.624 20.149,27.37 23.197,27.37 23.502,27.065 D4.1
NetD4_5: D4.5 D5.2 | length 10.6
  L1 - SIG/PWR w0.254: D4.5 25.102,29.91 25.483,29.529 26.245,29.529 26.626,29.148 26.626,28.259 26.88,28.005 30.817,28.005 31.071,27.751 D5.2
NetD4_6: D4.6 D5.1 | length 10.6
  L1 - SIG/PWR w0.254: D4.6 23.502,29.351 23.959,28.894 25.483,28.894 25.864,28.513 25.864,27.624 26.118,27.37 29.166,27.37 29.471,27.065 D5.1
NetD5_5: D5.5 D6.2 | length 10.6
  L1 - SIG/PWR w0.254: D5.5 31.071,29.91 31.452,29.529 32.214,29.529 32.595,29.148 32.595,28.259 32.849,28.005 36.786,28.005 37.04,27.751 D6.2
NetD5_6: D5.6 D6.1 | length 10.6
  L1 - SIG/PWR w0.254: D5.6 29.471,29.351 29.928,28.894 31.452,28.894 31.833,28.513 31.833,27.624 32.087,27.37 35.135,27.37 35.44,27.065 D6.1
NetD6_5: D6.5 D7.2 | length 10.6
  L1 - SIG/PWR w0.254: D6.5 37.04,29.91 37.421,29.529 38.183,29.529 38.564,29.148 38.564,28.259 38.818,28.005 42.755,28.005 43.009,27.751 D7.2
NetD6_6: D6.6 D7.1 | length 10.6
  L1 - SIG/PWR w0.254: D6.6 35.44,29.351 35.897,28.894 37.421,28.894 37.802,28.513 37.802,27.624 38.056,27.37 41.104,27.37 41.409,27.065 D7.1
NetD7_5: D7.5 D8.2 | length 10.6
  L1 - SIG/PWR w0.254: D7.5 43.009,29.91 43.39,29.529 44.152,29.529 44.533,29.148 44.533,28.259 44.787,28.005 48.724,28.005 48.978,27.751 D8.2
NetD7_6: D7.6 D8.1 | length 10.6
  L1 - SIG/PWR w0.254: D7.6 41.409,29.351 41.866,28.894 43.39,28.894 43.771,28.513 43.771,27.624 44.025,27.37 47.073,27.37 47.378,27.065 D8.1
NetD8_5: D8.5 D9.2 | length 10.6
  L1 - SIG/PWR w0.254: D8.5 48.978,29.91 49.359,29.529 50.121,29.529 50.502,29.148 50.502,28.259 50.756,28.005 54.693,28.005 54.947,27.751 D9.2
NetD8_6: D8.6 D9.1 | length 10.6
  L1 - SIG/PWR w0.254: D8.6 47.378,29.351 47.835,28.894 49.359,28.894 49.74,28.513 49.74,27.624 49.994,27.37 53.042,27.37 53.347,27.065 D9.1
NetD9_5: D9.5 D10.2 | length 10.6
  L1 - SIG/PWR w0.254: D9.5 54.947,29.91 55.328,29.529 56.09,29.529 56.471,29.148 56.471,28.259 56.725,28.005 60.662,28.005 60.916,27.751 D10.2
NetD9_6: D9.6 D10.1 | length 10.6
  L1 - SIG/PWR w0.254: D9.6 53.347,29.351 53.804,28.894 55.328,28.894 55.709,28.513 55.709,27.624 55.963,27.37 59.011,27.37 59.316,27.065 D10.1
NetD11_1: D11.1 D12.1 R7.2 U2.2 | length 24.2
  L1 - SIG/PWR w0.3: v1(-1.41,15.47) -1.41,14.44 v1(2.33,10.7)
  L4 - SIG/GND w0.15: v1(-1.41,15.47) -1.41,15.707 -1.322,15.795 -0.787,15.795 -0.217,16.365 U2.2
  L4 - SIG/GND w0.3: R7.2 v1(2.33,10.7) ; D11.1 4.928,8.602 4.928,9.418 4.671,9.675 3.355,9.675 v1(2.33,10.7) ; D12.1 5.176,17.051 5,16.876 5,11 4.7,10.7 v1(2.33,10.7)
NetD11_2: D11.2 PWR.1 PWR.2 R20.1 | length 11.6
  L1 - SIG/PWR w0.3: PWR.2 7.127,8.692 8.997,8.692 R20.1
  L4 - SIG/GND w0.3: PWR.1 0.743,8.544 D11.2 2.736,7.21 3.121,6.825 6.721,6.825 7.111,7.215 PWR.2
NetD14_1: D14.1 R15.0 R23.1 | length 6
  L4 - SIG/GND w0.3: D14.1 63.403,13.202 64.797,13.202 R15.0 64.81,14.022 65.15,14.362 65.98,14.362 66.919,15.301 R23.1
NetD14_2: D14.2 U5.7 | length 4.5
  L4 - SIG/GND w0.3: D14.2 65.89,15.465 66.165,15.74 U5.7
NetL1_1: L1.1 U2.5
NetLED1_1: LED1.1 R5.0 | length 1.9
  L4 - SIG/GND w0.3: R5.0 28.793,20.27 29.143,19.92 LED1.1@29.143,19.17
NetLED2_1: LED2.1 R9.0 | length 1.9
  L4 - SIG/GND w0.3: LED2.1 R9.0
NetLED3_1: LED3.1 R19.0 | length 1.6
  L1 - SIG/PWR w0.3: LED3.1 12.119,23.009 R19.0
NetR6_1: R6.1 R8.2 U2.1 | length 3.4
  L4 - SIG/GND w0.254: R8.2 -0.5,12.865 R6.1 -0.463,14.632 -0.463,15.302 0.064,15.829 U2.1@0.275,15.829
NetR12_1: R12.1 R16.0 U5.1 | length 22.5
  L1 - SIG/PWR w0.3: v2(63.205,6.591) 62.275,6.591 61.785,7.081 61.785,13.021 62.455,13.691 70.635,13.691 71.245,13.081 v1(71.245,12.581)
  L4 - SIG/GND w0.3: v2(63.205,6.591) R12.1 63.205,9.331 U5.1 ; v1(71.245,12.581) R16.0
NetR18_1: R18.1 R22.1 | length 1.4
  L4 - SIG/GND w0.3: R18.1 67.8,7.736 R22.1@69.23,7.736
NetR19_1: R19.1 U6.3 | length 7
  L1 - SIG/PWR w0.3: R19.1 13.519,23.265 14.472,22.312 16.81,22.312 U6.3
NetR23_0: R23.0 R24.0 U5.6 | length 20.4
  L4 - SIG/GND w0.3: R23.0 69.385,16.231 68.705,16.911 U5.6 70.125,18.791 73.735,18.791 74.125,18.401 74.125,8.551 73.325,7.751 R24.0
PWR_EN: D12.2 U6.10 | length 6.8
  L4 - SIG/GND w0.3: D12.2 9.949,17.051 11,16 12.337,16 13.231,15.106 U6.10
PWR_IND: C27.1 R20.0 R26.1 U6.2 | length 24
  L1 - SIG/PWR w0.3: R26.1 R20.0 C27.1 15.274,7.308 17.05,9.084 17.05,14.05 v1(18,15)
  L4 - SIG/GND w0.3: v1(18,15) 18,18.563 19.146,19.709 19.999,19.709 20.851,20.561 U6.2
R\E\S\E\T\: P2.6 U6.4 | length 18.8
  L4 - SIG/GND w0.3: U6.4 15.771,15.073 17.157,13.687 17.157,10.602 18.664,9.095 P2.6
SCK: D1.2 P2.5 U6.9 | length 35.9
  L1 - SIG/PWR w0.3: D1.2 7.195,23.78 9.455,21.52 9.455,17.723 10.691,16.487 ; U6.9 10.691,16.487 ; P2.5 27.116,12.666 24.722,15.059 19.157,15.059 18.528,15.689 11.489,15.689 10.691,16.487
VBAT: C15.1 L1.2 P3.1 PWR.3 PWR.4 R10.2 U2.3 | length 0
  L1 - SIG/PWR w0.3: R10.2@-0.99,24.775 R10.2
  other v1: -3.49,17.15 -3.49,17.67 -3.49,18.19 -3.49,18.71 -3.49,19.23 -3.49,19.75 -3.49,20.27 -3.49,20.79 -3.49,21.31
VBAT_LEVEL: R10.1 R11.2 U6.11 | length 26.5
  L1 - SIG/PWR w0.3: R10.1 R11.2 2.31,24.7 2.31,23.85 5.455,20.705 5.455,12.92 6.843,11.533 14.363,11.533 15.771,12.941 U6.11
pads on no net: D10.5 D10.6 U3.4 U4.4

## Polygon pours and split planes (outlines as drawn)
GND on L4 - SIG/GND "GND_L04_P000" (solid, remove dead copper, pour order 0): -5,0.25 -5,33.5 -5,33.75 cw(c-1.75,33.75) -1.75,37 74.75,37 cw(c74.75,33.75) 78,33.75 78,33.5 78,0.25 cw(c74.75,0.25) 74.75,-3 -1.75,-3 cw(c-1.75,0.25)
GND on L1 - SIG/PWR "GND_L01_P001" (solid, remove dead copper, pour order 1): -5,0.25 -5,33.5 -5,33.75 cw(c-1.75,33.75) -1.75,37 74.75,37 cw(c74.75,33.75) 78,33.75 78,33.5 78,0.25 cw(c74.75,0.25) 74.75,-3 -1.75,-3 cw(c-1.75,0.25)
VBAT on L3 - PWR (split plane): 0.788,10.575 0.795,10.523 0.815,10.474 0.847,10.432 0.889,10.4 0.938,10.38 0.99,10.373 9.248,10.373 9.248,-2.49 -1.75,-2.49 -1.765,-2.491 -1.965,-2.483 -2.179,-2.458 -2.39,-2.416 -2.597,-2.357 -2.799,-2.283 -2.995,-2.193 -3.182,-2.088 -3.361,-1.968 -3.531,-1.835 -3.689,-1.689 -3.835,-1.531 -3.968,-1.361 -4.088,-1.182 -4.193,-0.995 -4.283,-0.799 -4.357,-0.597 -4.416,-0.39 -4.458,-0.179 -4.483,0.035 -4.491,0.235 -4.49,0.25 -4.49,21.893 0.788,21.893
5V3 on L3 - PWR (split plane): 74.965,36.483 75.179,36.458 75.39,36.416 75.597,36.357 75.799,36.283 75.995,36.193 76.182,36.088 76.361,35.968 76.531,35.835 76.689,35.689 76.835,35.531 76.968,35.361 77.088,35.182 77.193,34.995 77.283,34.799 77.357,34.597 77.416,34.39 77.458,34.179 77.483,33.965 77.491,33.765 77.49,33.75 77.49,33.5 77.49,29.403 66.392,29.403 66.34,29.396 66.291,29.376 66.249,29.344 66.217,29.302 66.197,29.253 66.19,29.201 66.19,25.122 59.921,25.122 59.869,25.115 59.82,25.095 59.778,25.063 59.746,25.021 59.726,24.972 59.719,24.92 59.719,18.073 56.454,18.073 56.402,18.066 56.353,18.046 56.311,18.014 56.279,17.972 56.259,17.923 56.252,17.871 56.252,-2.49 9.652,-2.49 9.652,10.575 9.645,10.627 9.625,10.676 9.593,10.718 9.551,10.75 9.502,10.77 9.45,10.777 1.192,10.777 1.192,22.095 1.185,22.147 1.165,22.196 1.133,22.238 1.091,22.27 1.042,22.29 0.99,22.297 -4.49,22.297 -4.49,33.5 -4.49,33.75 -4.491,33.765 -4.483,33.965 -4.458,34.179 -4.416,34.39 -4.357,34.597 -4.283,34.799 -4.193,34.995 -4.088,35.182 -3.968,35.361 -3.835,35.531 -3.689,35.689 -3.531,35.835 -3.361,35.968 -3.182,36.088 -2.995,36.193 -2.799,36.283 -2.597,36.357 -2.39,36.416 -2.179,36.458 -1.965,36.483 -1.765,36.491 -1.75,36.49 74.75,36.49 74.765,36.491
5V_A on L3 - PWR (split plane): 77.49,0.25 77.491,0.235 77.483,0.035 77.458,-0.179 77.416,-0.39 77.357,-0.597 77.283,-0.799 77.193,-0.995 77.088,-1.182 76.968,-1.361 76.835,-1.531 76.689,-1.689 76.531,-1.835 76.361,-1.968 76.182,-2.088 75.995,-2.193 75.799,-2.283 75.597,-2.357 75.39,-2.416 75.179,-2.458 74.965,-2.483 74.765,-2.491 74.75,-2.49 56.656,-2.49 56.656,17.669 59.921,17.669 59.973,17.676 60.022,17.696 60.064,17.728 60.096,17.77 60.116,17.819 60.123,17.871 60.123,24.718 66.392,24.718 66.444,24.725 66.493,24.745 66.535,24.777 66.567,24.819 66.587,24.868 66.594,24.92 66.594,28.999 77.49,28.999
5V_D on L3 - PWR (split plane): 30.608,16.384 26.287,16.384 26.235,16.377 26.186,16.357 26.144,16.325 26.112,16.283 26.092,16.234 26.085,16.182 26.088,16.159 26.088,10.893 26.095,10.841 26.115,10.792 26.147,10.75 26.189,10.718 26.238,10.698 26.29,10.691 53.258,10.691 53.258,5.732 17.238,5.732 17.238,12.356 17.238,24.898 30.608,24.898
GND on L2 - GND (split plane): 74.965,36.483 75.179,36.458 75.39,36.416 75.597,36.357 75.799,36.283 75.995,36.193 76.182,36.088 76.361,35.968 76.531,35.835 76.689,35.689 76.835,35.531 76.968,35.361 77.088,35.182 77.193,34.995 77.283,34.799 77.357,34.597 77.416,34.39 77.458,34.179 77.483,33.965 77.491,33.765 77.49,33.75 77.49,33.5 77.49,0.25 77.491,0.235 77.483,0.035 77.458,-0.179 77.416,-0.39 77.357,-0.597 77.283,-0.799 77.193,-0.995 77.088,-1.182 76.968,-1.361 76.835,-1.531 76.689,-1.689 76.531,-1.835 76.361,-1.968 76.182,-2.088 75.995,-2.193 75.799,-2.283 75.597,-2.357 75.39,-2.416 75.179,-2.458 74.965,-2.483 74.765,-2.491 74.75,-2.49 -1.75,-2.49 -1.765,-2.491 -1.965,-2.483 -2.179,-2.458 -2.39,-2.416 -2.597,-2.357 -2.799,-2.283 -2.995,-2.193 -3.182,-2.088 -3.361,-1.968 -3.531,-1.835 -3.689,-1.689 -3.835,-1.531 -3.968,-1.361 -4.088,-1.182 -4.193,-0.995 -4.283,-0.799 -4.357,-0.597 -4.416,-0.39 -4.458,-0.179 -4.483,0.035 -4.491,0.235 -4.49,0.25 -4.49,33.5 -4.49,33.75 -4.491,33.765 -4.483,33.965 -4.458,34.179 -4.416,34.39 -4.357,34.597 -4.283,34.799 -4.193,34.995 -4.088,35.182 -3.968,35.361 -3.835,35.531 -3.689,35.689 -3.531,35.835 -3.361,35.968 -3.182,36.088 -2.995,36.193 -2.799,36.283 -2.597,36.357 -2.39,36.416 -2.179,36.458 -1.965,36.483 -1.765,36.491 -1.75,36.49 74.75,36.49 74.765,36.491

## Keep-outs
Keep-Out Layer:
  lines w1: -5,33.5 -5,0.25 ccw(c-1.75,0.25) -1.75,-3 75,-3 ; -5,33.75 cw(c-1.75,33.75) -1.75,37 74.75,37 cw(c74.75,33.75) 78,33.75 ; 74.75,-3 ccw(c74.75,0.25) 78,0.25 78,33.5

## Other copper
L1 - SIG/PWR:
  region net VBAT: -0.34,25.225 -3.84,25.225 -3.84,16.02 -2.16,16.02 -2.16,23.92 -0.34,23.92
L4 - SIG/GND:
  region net 5V3: 4.15,16.015 2.55,16.015 2.55,13.565 4.15,13.565
  region net GND: -1.63,13.72 -3.23,13.72 -3.23,11.27 -1.63,11.27
  rectangle net GND: 2.55,18.315 4.15,20.765
  region net 5V_D: 22.377,17.22 20.367,17.22 20.037,16.89 19.227,16.89 19.227,17.52 22.302,17.52
  region net 5V_D: 22.388,17.82 20.367,17.82 20.037,18.15 19.227,18.15 19.227,17.52 22.313,17.52
  region net 5V3: 59.46,17.051 58.51,17.051 58.51,20.661 59.46,20.661
  region net VBAT: 0.605,16.71 0.605,17.02 0.21,17.415 -0.305,17.415 -1.21,18.32 -1.21,22.56 -3.84,22.56 -3.84,16.02 -0.88,16.02 -0.19,16.71
  region net 5V3: 24.538,15.92 28.553,15.92 28.553,15.12 24.538,15.12
  region net NetL1_1: 2.075,16.52 2.075,16.21 0.865,16.21 0.76,16.315 0.76,17.055 0.327,17.488 0.327,22.56 1.827,22.56 1.827,17.632 1.26,17.065 1.26,16.675 1.415,16.52
  region net 5V3: 1.745,15.71 2.54,14.915 4.15,14.915 4.15,16.02 1.415,16.02 1.415,15.71
  region net GND: 1.415,17.02 2.24,17.845 2.24,19.105 2.55,19.415 4.15,19.415 4.15,18.315 2.545,16.71 1.415,16.71
L3 - PWR (plane layer: these items are gaps in the copper):
  lines w0.4: -5.1,22.095 0.99,22.095 0.99,10.575 9.45,10.575 9.45,-3 ; 26.287,16.182 30.81,16.182 30.81,25.1 26.29,25.1 17.036,25.1 17.036,12.356 17.036,5.53 24.22,5.53 53.46,5.53 53.46,10.893 26.29,10.893 26.29,16.182 ; 55.457,-2.871 75.797,-2.871 76.989,-1.679 ; 56.454,-3.009 56.454,17.871 59.921,17.871 59.921,24.92 66.392,24.92 66.392,29.201 77.988,29.201 ; 78,30.87 78,30.9
  lines w1: 78,29.24 78,30.13

## Silkscreen, mask and mechanical layers (free items; w line width, h text height)
Top Overlay:
  lines w0.4: 23.553,10.618 26.017,10.618 26.017,11.309 27.116,11.309 28.215,11.309 28.215,10.618 30.679,10.618 ; 25.242,19.001 ccw(c25.27,17.014) 25.251,15.027 ; 25.27,13.682 25.27,20.338
  text "Discø Lights" at 28.9,20.43 h6
  text "+" at -3.129,1.822 h3
  text "Vi ses på LTH!" at 24.6,1.711 h4
  text "etf.nu" at 60,-1 h3
  text "Friskt kopplat, hälften brunnit" at 24.4,-1.044 h2
Bottom Overlay:
  text "Powered by Arbitrary Intelligence" at 57.653,31.166 h3
  text "+" at -1.785,1.822 h3
  text "ElektroTekniska" at 43.533,1.308 h3
  text "Rev 2.1" at 11.4,-0.879 h2
  text "Untz, untz, untz" at 70.4,-0.972 h3
  text "Föreningen" at 40.5,-1 h3